# Altium PCB Dog_Tag.PcbDoc
Units mil, origin at the board's own origin, x right, y up, seen from the top; angles counter-clockwise.
Board outline 2793.69 x 1354.84 mil, 2 copper layers (Top Layer, Bottom Layer), stack 21 mil thick; 42 components, 36 nets, 170 pads, 41 vias.
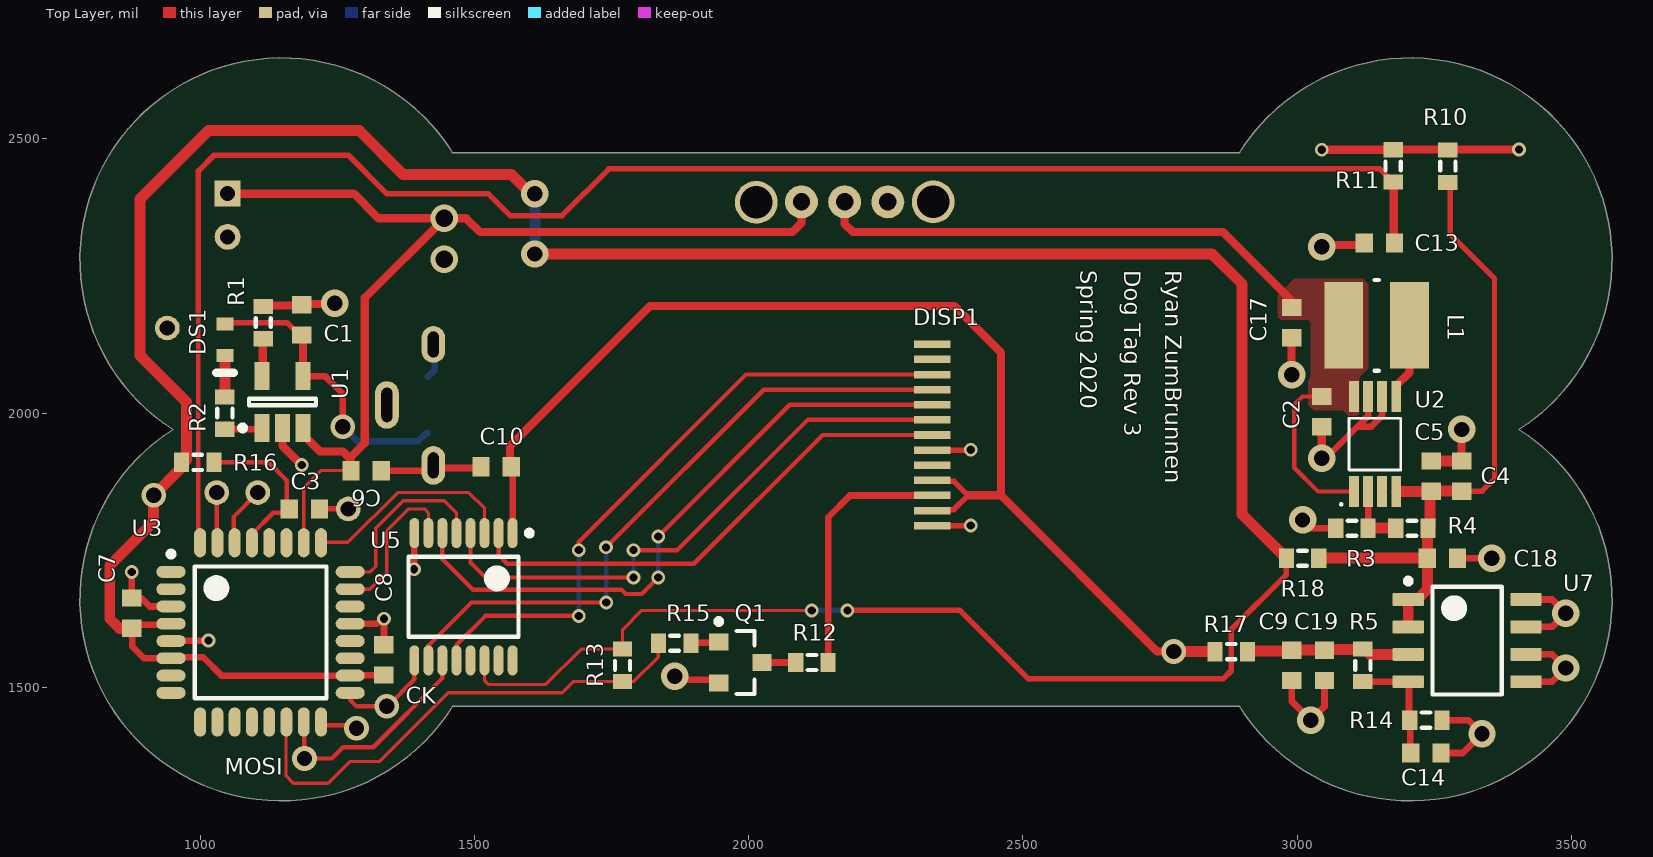
[diagram p0: Top Layer view]
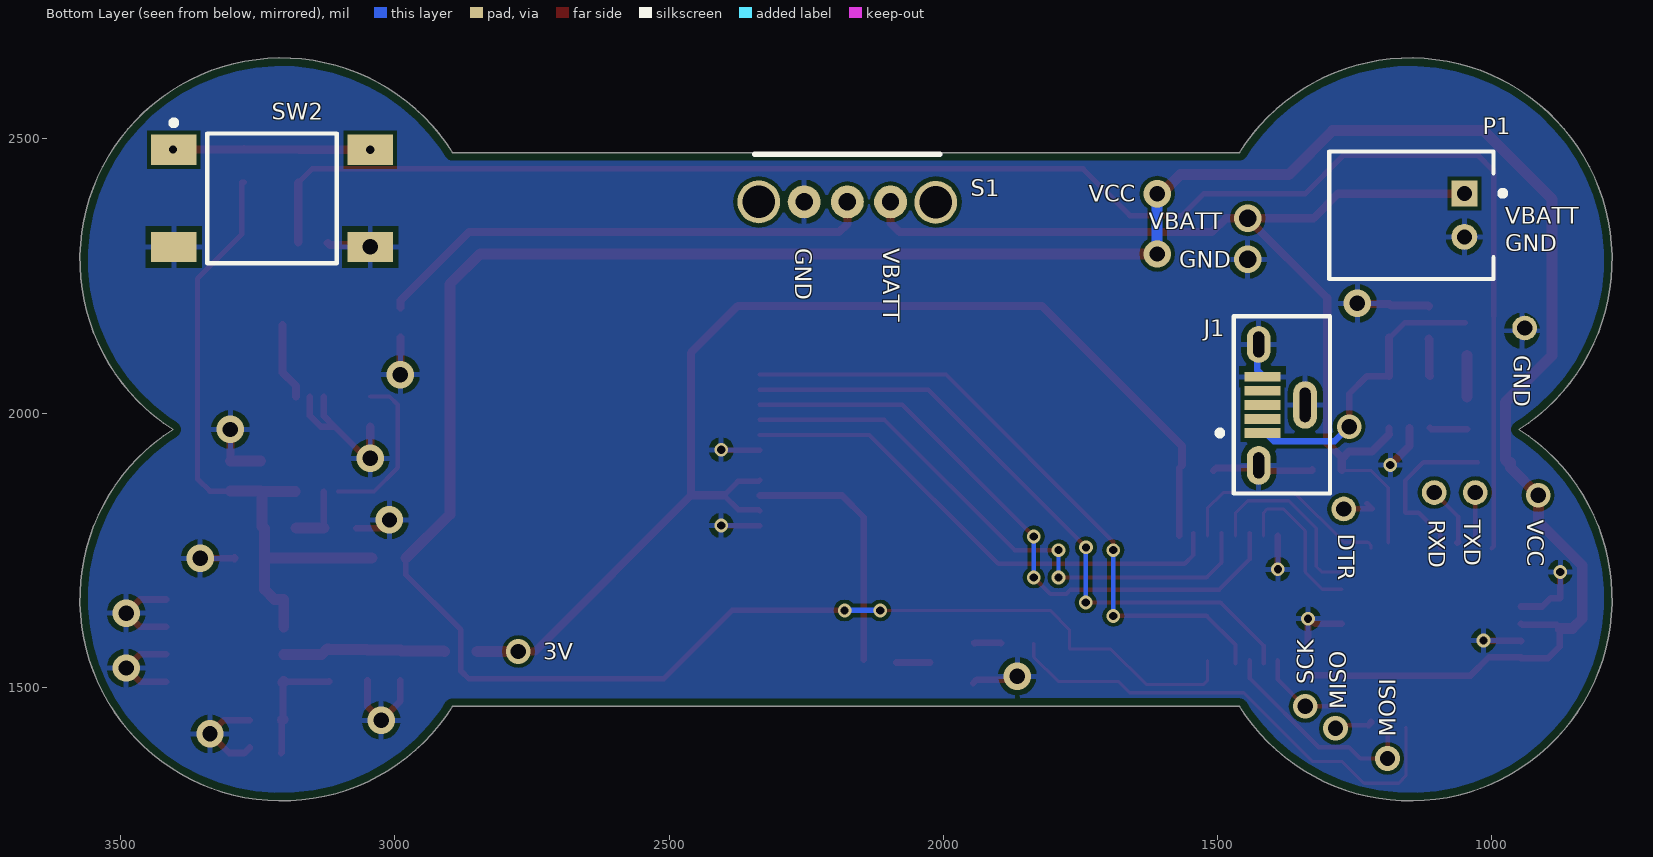
[diagram p1: Bottom Layer view, seen from below]
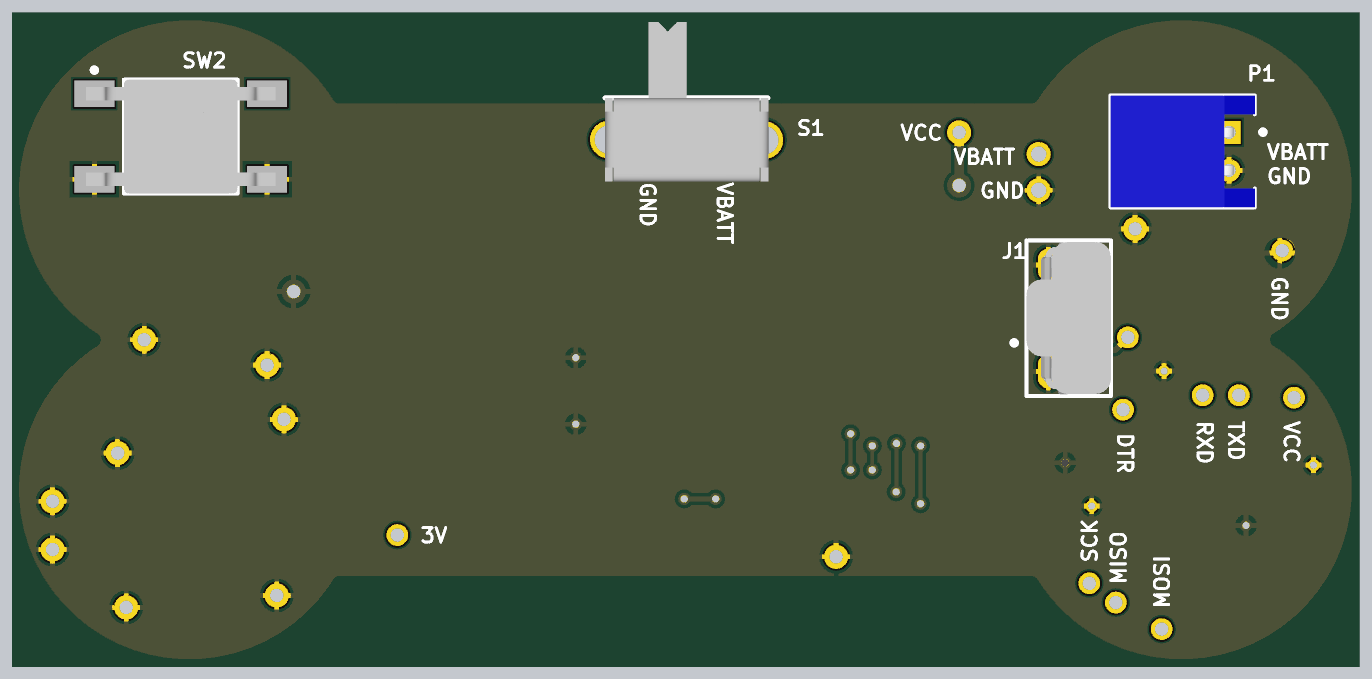
[diagram p2: 3D render of the assembled board from below, using the file's embedded part models]

## Layer stack, top to bottom
Top Solder: solder mask 0.4, Solder Resist, Dk 3.5
Top Layer: signal copper 1.4
Dielectric 2: prepreg 2.8, Composite dielectric, Dk 4.56
Dielectric 1: prepreg 12.6, Composite dielectric, Dk 4.56
Dielectric 3: prepreg 2.8, Composite dielectric, Dk 4.56
Bottom Layer: signal copper 1.4
Bottom Solder: solder mask 0.4, Solder Resist, Dk 3.5

## Board outline
1459.94,1465.04 cw(c1148.31,1660.3) 950,1970 cw(c1148.31,2279.7) 1459.94,2474.96 1460,2475 2895,2475 2895.06,2474.96 cw(c3206.69,2279.7) 3405,1970 cw(c3206.69,1660.3) 2895.06,1465.04 2895,1465

## Design rules (kind name [scope] priority, off if disabled: settings)
BoardOutlineClearance [All] p1: gap=15 ignorepadtopadclearanceinfootprint=FALSE
Clearance [All] p1: gap=7 ignorepadtopadclearanceinfootprint=FALSE
MinimumSolderMaskSliver [All] p1: minsoldermaskwidth=1.5
PolygonConnect PolygonConnect_5 [All vs IsNamedPolygon('VSW_L01_P018')] p1: thpad.connectstyle=Direct thpad.reliefconductorwidth=10 thpad.reliefentries=4 thpad.polygonreliefangle="90 Angle" thpad.airgapwidth=10 smdpad.connectstyle=Direct smdpad.reliefconductorwidth=10 smdpad.reliefentries=4 smdpad.polygonreliefangle="90 Angle" smdpad.airgapwidth=10 via.connectstyle=Relief via.reliefconductorwidth=10 via.reliefentries=4 via.polygonreliefangle="90 Angle" via.airgapwidth=10
PolygonConnect PolygonConnect_4 [All vs IsNamedPolygon('VSW_L01_P018')] p2: connectstyle=Relief reliefconductorwidth=15 reliefentries=4 polygonreliefangle="90 Angle" airgapwidth=10
PolygonConnect PolygonConnect_3 [All vs IsNamedPolygon('VSW_L01_P018')] p3: thpad.connectstyle=Relief thpad.reliefconductorwidth=10 thpad.reliefentries=4 thpad.polygonreliefangle="90 Angle" thpad.airgapwidth=10 smdpad.connectstyle=Relief smdpad.reliefconductorwidth=15 smdpad.reliefentries=4 smdpad.polygonreliefangle="90 Angle" smdpad.airgapwidth=10 via.connectstyle=Relief via.reliefconductorwidth=10 via.reliefentries=4 via.polygonreliefangle="90 Angle" via.airgapwidth=10
PolygonConnect PolygonConnect_2 [All vs IsNamedPolygon('VSW_L01_P018')] p4: thpad.connectstyle=Relief thpad.reliefconductorwidth=10 thpad.reliefentries=4 thpad.polygonreliefangle="90 Angle" thpad.airgapwidth=10 smdpad.connectstyle=Direct smdpad.reliefconductorwidth=10 smdpad.reliefentries=4 smdpad.polygonreliefangle="90 Angle" smdpad.airgapwidth=10 via.connectstyle=Relief via.reliefconductorwidth=10 via.reliefentries=4 via.polygonreliefangle="90 Angle" via.airgapwidth=10
PolygonConnect PolygonConnect_1 [All vs IsNamedPolygon('Top Layer-VBatt') Or  IsNamedPolygon('Top Layer-NetD5_1')] p5: connectstyle=Direct reliefconductorwidth=10 reliefentries=4 polygonreliefangle="90 Angle" airgapwidth=10
PolygonConnect [All] p6: connectstyle=Relief reliefconductorwidth=10 reliefentries=4 polygonreliefangle="90 Angle" airgapwidth=10
RoutingVias [All] p1: holewidth=28 width=50 viastyle="Through Hole" minholewidth=15 minwidth=25 maxholewidth=50 maxwidth=100
SilkToSilkClearance [All] p1: silktosilkclearance=5
SilkToSolderMaskClearance [IsPad] p1: minsilkscreentomaskgap=3.5 clearancetoexposedcopper=TRUE
SolderMaskExpansion [All] p1: expansion=4
Width [All] p1: maxlimit=30 minlimit=6 preferedwidth=10
27 further rules are at their usual default settings.

## Components (designator, comment, footprint, x,y, rotation, side; value= is the part's Value field where it differs from the comment)
C1 "Cap Semi" 1608[0603] 1185,2170 r270 top value=10uF
C2 "Cap Semi" 1608[0603] 3045,2002.44 r90 top value=10uF
C3 "Cap Semi" 1608[0603] 1190,1825 r180 top value=0.1uF
C4 "Cap Semi" 1608[0603] 3300,1885 r270 top value=10uF
C5 "Cap Semi" 1608[0603] 3245,1885 r270 top value=10uF
C6 "Cap Semi" 1608[0603] 1302.56,1895 r180 top value=10uF
C7 "Cap Semi" 1608[0603] 875,1635 r270 top value=10uF
C8 "Cap Semi" 1608[0603] 1335,1550 r270 top value=10uF
C9 "Cap Semi" 1608[0603] 2990,1540 r90 top value=10uF
C10 "Cap Semi" 1608[0603] 1539.61,1902.24 r0 top value=10uF
C13 "Cap Semi" 1608[0603] 3150,2310 r0 top value=0.1uF
C14 "Cap Semi" 1608[0603] 3235,1380 r180 top value=330pF
C17 "Cap Semi" 1608[0603] 2990,2165 r90 top value=10uF/4.7uF
C18 "Cap Semi" 1608[0603] 3265,1735 r180 top value=10uF
C19 "Cap Semi" 1608[0603] 3050,1540 r90 top value=10uF
DISP1 "DISP_LCD_GENERIC_SPI_1.14IN_240X135_WRAPUNDER" TFT1.14 2335,2125.24 r0 top locked (schematic designator DISP?)
DS1 "TLMS1000-GS08" VISH-TLMS1000_V 1045,2133.54 r270 top
J1 "1051330011" MOLX-1051330011-5_V 1382.68,2014.76 r90 bottom
L1 "Inductor" SRN4018TA-4R7M 3145,2160 r180 top value=4.7uH
P1 "S2B-PH-K-S(LF)(SN)" JST-S2B-PH-K-S_V 1146.46,2360.63 r270 bottom
Q1 "MMBT2222ALT1G" ONSC-SOT-23-3-318-08_V 1985,1545 r0 top
R1 "Res3" J1-0603 1115,2165 r90 top value=5K
R2 "Res3" J1-0603 1045,2000 r270 top value=470
R3 "Res3" J1-0603 3100,1790 r180 top value=309K
R4 "Res3" J1-0603 3209.53,1790 r180 top value=953K
R5 "Res3" J1-0603 3120,1540 r90 top value=100K
R10 "Res3" J1-0603 3275,2450 r270 top value=100K
R11 "Res3" J1-0603 3175,2450.47 r90 top value=10K
R12 "Res3" J1-0603 2115.47,1545 r0 top value=22
R13 "Res3" J1-0603 1770,1540 r90 top value=10K
R14 "Res3" J1-0603 3235,1440 r180 top value=143K
R15 "Res3" J1-0603 1865,1580 r180 top value=1K
R16 "Res3" J1-0603 995.47,1910 r180 top value=10K
R17 "Res3" J1-0603 2880,1565 r0 top value=0
R18 "Res3" J1-0603 3010,1735 r0 top value=0
S1 "SW-SPDT" OS102011MA1QN1 2175,2385 r0 bottom
SW2 "FSM6JSMA" TECO-FSM6JSMA_V 3224.13,2391.42 r90 bottom
U1 "MCP73831T-2ATI/OT" SOT-23-OT5_M 1150,2020 r90 top
U2 "MCP1642D" MCP1642D 3103.82,1856.77 r90 top
U3 "ATmega328P-AU" 32A_L 1110,1600 r0 top
U5 "74HC4050PW,118" 74HC4050PW 1480,1665 r270 top
U7 "TL5209DR" D0008A_N 3310,1585 r0 top

## Footprints (in the part's own frame and the unit in brackets; to place one, negate y for a bottom-side part, rotate by r counter-clockwise, add the part's x,y. Pads: shape width x height; smd on the part's side, far side on the other; paste and mask are expansions set on the pad)
32A_L [mm] "Thin QFP, 32-Leads, Body 7x7mm, Pitch 0.8mm, IPC High Density"
  oval 1.35x0.55 smd: 1(-4.15,2.8) 2(-4.15,2) 3(-4.15,1.2) 4(-4.15,0.4) 5(-4.15,-0.4) 6(-4.15,-1.2) 7(-4.15,-2) 8(-4.15,-2.8) 17(4.15,-2.8) 18(4.15,-2) 19(4.15,-1.2) 20(4.15,-0.4) 21(4.15,0.4) 22(4.15,1.2) 23(4.15,2) 24(4.15,2.8)
  oval 0.55x1.35 smd: 9(-2.8,-4.15) 10(-2,-4.15) 11(-1.2,-4.15) 12(-0.4,-4.15) 13(0.4,-4.15) 14(1.2,-4.15) 15(2,-4.15) 16(2.8,-4.15) 25(2.8,4.15) 26(2,4.15) 27(1.2,4.15) 28(0.4,4.15) 29(-0.4,4.15) 30(-1.2,4.15) 31(-2,4.15) 32(-2.8,4.15)
  silkscreen extent -4.27,-3.05 3.05,3.75, body extent -3.5,-3.5 3.5,3.5, height 1.2
74HC4050PW [mm] "Buffer, Non-Inverting 6 Element 1 Bit per Element Push-Pull Output 16-TSSOP"
  oval 1.4x0.45 smd: 1(-2.95,2.275) 2(-2.95,1.625) 3(-2.95,0.975) 4(-2.95,0.325) 5(-2.95,-0.325) 6(-2.95,-0.975) 7(-2.95,-1.625) 8(-2.95,-2.275) 9(2.95,-2.275) 10(2.95,-1.625) 11(2.95,-0.975) 12(2.95,-0.325) 13(2.95,0.325) 14(2.95,0.975) 15(2.95,1.625) 16(2.95,2.275)
  silkscreen extent -3.07,-2.55 1.85,3.17, body extent -3.2,-2.55 3.2,2.55, height 1.1
1608[0603] [mm] "Chip Capacitor, Body 1.6x0.8mm, IPC High Density"
  rect 0.8x0.9 smd: 1(-0.7,0) 2(0.7,0)
  body extent -0.87,-0.48 0.87,0.48, height 1.3
D0008A_N [mm] "SOIC, 8-Leads, Body 5x4mm, Pitch 1.27mm, IPC Medium Density"
  rrect17% 1.45x0.6 smd: 1(-2.725,1.905) 2(-2.725,0.635) 3(-2.725,-0.635) 4(-2.725,-1.905) 5(2.725,-1.905) 6(2.725,-0.635) 7(2.725,0.635) 8(2.725,1.905)
  silkscreen extent -2.85,-2.5 1.6,2.88, body extent -3,-2.45 3,2.45, height 1.63
J1-0603 [mm] "Chip Resistor, Body 1.6x0.8mm, IPC High Density"
  rect 0.7x0.9 smd: 1(-0.75,0) 2(0.75,0)
  silkscreen extent -0.2,-0.35 0.2,0.35, body extent -0.85,-0.48 0.85,0.48, height 0.9
JST-S2B-PH-K-S_V [mm] "THD, 2-Leads, Body 7.6x5.9mm, Pitch 2mm"
  rect 1.2x1.2 hole 0.7: 1(-1,2.45)
  round 1.2 hole 0.7: 2(1,2.45)
  silkscreen extent -2.95,-3.8 2.95,4.35, body extent -2.95,-3.8 2.95,3.8, height 4.8
MCP1642D [mm] "Boost Switching Regulator IC Positive Adjustable 1.8V 1 Output 800mA 8-TSSOP, 8-MSOP (0.118\", 3.00mm Width)"
  rect 1.45x0.45 smd: 1(0,0) 2(0,-0.65) 3(0,-1.3) 4(0,-1.95) 5(4.4,-1.95) 6(4.4,-1.3) 7(4.4,-0.65) 8(4.4,0)
  silkscreen extent -0.64,-2.16 3.39,0.64
MOLX-1051330011-5_V [mm] "Micro-B USB, 5-Leads, Body 8x4.45mm, Pitch 0.65mm"
  rect 0.45x1.651 smd: 1(-1.3,0.901) 2(-0.65,0.901) 3(0,0.901) 4(0.65,0.901) 5(1.3,0.901)
  oval 1.8x1.1 hole 0.5 slot 1.2 at 0 deg: 6(-2.8,1.075)
  oval 1.7x1.1 hole 0.5 slot 1.2 at 0 deg: 7(2.8,1.075)
  oval 2.2x1.1 hole 0.5 slot 1.6 at 0 deg: 8(0,-1.075)
  silkscreen extent -4.1,-2.22 4.1,3, body extent -4.01,-2.22 4.01,2.23, height 7.5
ONSC-SOT-23-3-318-08_V [mm] "SOT23, 3-Leads, Body 2.92x1.3mm, Pitch 0.95mm"
  rect 0.9x0.8 smd: 1(-1,0.95) 2(-1,-0.95) 3(1,0)
  silkscreen extent -1.12,-1.46 0.65,2.02, body extent -0.65,-1.46 0.65,1.46, height 1.11
OS102011MA1QN1 [mil] "Slide Switch SPDT Through Hole, Right Angle"
  round 60 hole 31.5: 1(-78.74,0) 2(0,0) 3(78.74,0)
  silkscreen extent -169,-87 169,-87, body extent -169,-244 169,87, height 187
SOT-23-OT5_M [mm] "SOT23, 5-Leads, Body 2.9x1.7mm, Pitch 0.95mm, Lead Span 2.8mm, IPC Low Density"
  rect 1.3x0.7 smd: 1(-1.2,0.95) 2(-1.2,0) 3(-1.2,-0.95) 4(1.2,-0.95) 5(1.2,0.95)
  silkscreen extent -1.32,-1.55 0.15,1.97, body extent -0.9,-1.55 0.9,1.55, height 1.45
SRN4018TA-4R7M [mm] "4.7µH Semi-Shielded Wirewound Inductor 1.7A 70mOhm Nonstandard"
  rect 1.8x4 smd: 1(-1.524,0) 2(1.524,0)
  silkscreen extent -0.1,-2.1 0.1,2.1, body extent -2.1,-2.1 2.1,2.1, height 1.8
TECO-FSM6JSMA_V [mm] "SMD, 4-Leads, Body 6x6mm, Pitch 4.5mm"
  rect 1.4x2.1 smd: 1(2.25,4.55) 2(2.25,-4.55) 3(-2.25,4.55) 4(-2.25,-4.55)
  silkscreen extent -3,-3 3.62,4.68, body extent -3,-5 3,5, height 7.11
TFT1.14 [mm] "LCD Pinout"
  rect 1.7x0.35 smd: 1(0,0) 2(0,-0.7) 3(0,-1.4) 4(0,-2.1) 5(0,-2.8) 6(0,-3.5) 7(0,-4.2) 8(0,-4.9) 9(0,-5.6) 10(0,-6.3) 11(0,-7) 12(0,-7.7) 13(0,-8.4)
VISH-TLMS1000_V [mm] "SMD, 2-Leads, Body 0.8x1.6mm"
  rect 0.6x0.8 smd: 1(-0.725,0) 2(0.725,0)
  silkscreen extent 1.52,-0.4 1.52,0.4, body extent -0.8,-0.4 0.8,0.4, height 0.65

## Part data
C1 C2 C3 C4 C5 C6 C7 C8 C9 C10 C13 C14 C17 C18 C19: "Capacitor (Semiconductor SIM Model)", LatestRevisionDate=29-May-2009, LatestRevisionNote="IPC-7351 Footprint Added.", PackageDescription="Chip Capacitor", PackageReference=C1206, Published=8-Jun-2000, Publisher="Altium Limited"
DS1: library part CMP-2000-07254-1, "Low Current LED, 40 mW, 1.8 V, -40 to 100 degC, 2-Pin SMD (0603), RoHS, Tape and Reel", Forward Current If=2mA, Forward Voltage=1.8V, LED Colour=Red, Manufacturer=Vishay, Package Description="2-Pin Surface Mount Device, Body 1.6 x 0.8 mm", Package Reference=TLMS1000, Automotive Qualification Standard=AEC-Q100, Bulb Size=1.6mmx0.8mm, Datasheet URL=https://datasheet.ciiva.com/5798/1698881-5798337.pdf, Datasheet Version="Rev. 1.7, 02/2011", LED Mounting=SMD, Lens Shape=Rectangular, Luminous Intensity=4mcd, Manufacturer URL=http://www.vishay.com/, Mounting Technology=SurfaceMount, MSL=MSL2-1year, Packaging=CutTape, Product Range=-, SVHC=ToBeAdvised, Viewing Angle=80°, Wavelength Typ=636nm
J1: library part CMP-2000-05241-1, "Micro-B USB Vertical Type, -30 to 85 degC, 5-Pin SMD, RoHS, Tape and Reel", Manufacturer=Molex, Standard Package=500, 3D Model=105133-0011.stp, Category=Connectors,Interconnects, Connector Type=USB-microB, Datasheet URL=http://www.molex.com/pdm_docs/sd/1051330011_sd.pdf, Datasheet Version="Rev. G, 01/2011", Family=USB,DVI,HDMIConnectors, Featured Product=USBConnectors, Features=BoardGuide, Gender=Receptacle, Ingress Protection=-, Manufacturer URL=http://www.molex.com/, Mounting Type=SurfaceMountVertical, Number of Contacts=5, Online Catalog=Molex-MicroUSB, Other Names=105133-0011887191097947WM10134TR, Packaging=Tape&Reel(TR), PCN Other=105133Series21/Jul/2015, PCN Packaging=105133Series03/Oct/2015, RoHS Information=105133-0011Cert.ofCompliance, Series=105133, Specifications=-
P1: library part CMP-1755-00004-1, "Male Header, Pitch 2 mm, 1 x 2 Position, Height 4.8 mm, Tail Length 3.4 mm, -25 to 85 degC, RoHS, Bulk", Capacitance="10 uF", Case\Package=Radial, Max Operating Temperature="85 degC", Min Operating Temperature="-40 degC", Package Quantity=200, Tolerance=20%, Voltage Rating="50 V", ComponentLink1Description=Datasheet, ComponentLink1URL=http://www.jst-mfg.com/product/pdf/eng/ePH.pdf, DatasheetVersion=Dec-12, Diameter="5 mm", Height="11 mm", Lead Pitch="2 mm", Length="11 mm", Mount="Through Hole", PackageDescription="Male Header, Pitch 2 mm, 1 x 2 Position, Height 4.8 mm, Tail Length 3.4 mm", PackageReference=S2B-PH-K-S, Packaging=Bulk, Pins=2, Radiation Hardening=No, REACH SVHC="No SVHC", RoHSCompliant=true, Voltage Rating (DC)="50 V"
Q1: library part CMP-1048-00538-1, "General Purpose Transistor, NPN Silicon, 3-Pin SOT-23, Pb-Free, Tape and Reel", Manufacturer="On Semiconductor", ComponentLink1Description="Manufacturer URL", ComponentLink1URL=http://www.onsemi.com/, ComponentLink2Description=Datasheet, ComponentLink2URL=http://www.onsemi.cn/pub_link/Collateral/MMBT2222LT1-D.PDF, ComponentLink3Description="Package Specification", ComponentLink3URL=http://www.onsemi.cn/pub_link/Collateral/318-08.PDF, DatasheetVersion="Rev. 10", fT Min (MHz)=300, IC Continuous (A)=0.6, Mounting Technology="Surface Mount", PackageDescription="3-Pin Small Outline Transistor, Body 2.92 x 1.3 mm, Pitch 0.95 mm", PackageReference=SOT-23-3-318-08, PackageVersion="Rev. AP, 11/2009", Packing="Tape and Reel", PartNumber=MMBT2222ALT1G, Polarity=NPN, RoHS=TRUE
R1 R2 R3 R4 R5 R10 R11 R12 R13 R14 R15 R16 R17 R18: "Resistor", LatestRevisionDate=29-May-2009, LatestRevisionNote="IPC-7351 Footprint Added.", PackageDescription="Chip Resistor", PackageReference=J1-0603, Published=8-Jun-2000, Publisher="Altium Limited"
S1: "SPDT Subminiature Toggle Switch, Right Angle Mounting, Vertical Actuation", ComponentLink1Description="Manufacturer Link", ComponentLink1URL=http://www.apem.com, DatasheetVersion=05-Dec-2000, LatestRevisionDate=17-Dec-2003, LatestRevisionNote="Schematic revised, PCB Footprint replaced.", PackageDescription="Switch; 4 Leads", PackageReference=TL36WW15050, Published=24-Mar-1999, Publisher="Altium Limited"
SW2: library part CMP-2000-07503-1, "Switch, SPST, 24 V, -35 to 85 degC, 4-Pin SMD, RoHS, Tape and Reel", Case\/Package=SMD/SMT, Contact Current Rating=50mA, Contact Resistance=100mOhm, Insulation Resistance=100MOhm, Manufacturer="TE Connectivity", Max Operating Temperature=85degC, Max Voltage Rating (DC)=12V, Min Operating Temperature=-35degC, Operating Force=1.57N, Package Description="4-Pin Surface Mount Device, Body 6 x 6 mm, Pitch 4.5 mm", Package Quantity=750, Voltage Rating=24V, Actuator Length=3.4mm, Actuator Material=Polyamide, Contact Material=CopperAlloy, Contact Plating=Silver, Current Rating=50mA, Datasheet URL=http://www.te.com/commerce/DocumentDelivery/DDEController?Action=showdoc&DocId=Customer+Drawing%7F2-1437565-7%7FV%7Fpdf%7FEnglish%7FENG_CD_2-1437565-7_V.pdf%7F4-1437565-9, Datasheet Version="Rev. V, 02/2015", Electrical Life=100000Cycles, ELV=Compliant, Illumination Type=Illuminated, Lead Free=LeadFree, Length=6mm, Manufacturer URL=http://www.te.com/, Mechanical Life=100000Cycles, Mount=SurfaceMount, Mounting Technology=SurfaceMount, Orientation=Straight, Package Reference=FSM6JSMA, Packaging=LoosePiece, REACH SVHC=Unknown, RoHSCompliant=true, Switch Travel=0.25mm, Termination=GullWing, Throw Configuration=SPST, Voltage Rating (DC)=24V, Width=6mm
U1: library part CMP-0133-00144-1, "Miniature Single-Cell, Fully Integrated Li-Ion, Li-Polymer Charge Management Controller, 4.2V, 5-Pin SOT-23, Industrial Temperature, Tape and Reel", Code_IPC=SOT23-5, DatasheetVersion="revE, Sep-2008", PackageDescription="5-Lead Plastic Small Outline Transistor (OT) [SOT-23]", PackageReference=SOT-23-OT5, PackageVersion="revBB, Aug-2009"
U2: library part MCP1642D-ADJI/MS, "Boost Switching Regulator IC Positive Adjustable 1.8V 1 Output 800mA 8-TSSOP, 8-MSOP (0.118\", 3.00mm Width)", ComponentLink1Description=Digikey, ComponentLink1URL=https://www.digikey.com/product-detail/en/microchip-technology/MCP1642D-ADJI-MS/MCP1642D-ADJI-MS-ND/5137721
U3: library part CMP-0095-00269-2, "8-bit AVR Microcontroller, 32KB Flash, 1KB EEPROM, 2KB SRAM, 32-pin TQFP, Industrial Grade (-40°C to 85°C)", Code_JEDEC=MS-026-ABA, ComponentLink1Description="Manufacturer URL", ComponentLink1URL=http://www.atmel.com/, ComponentLink2Description="ATmega48A/48PA/88A/88PA/168A/168PA/328/328P Datasheet", ComponentLink2URL=http://www.atmel.com/dyn/resources/prod_documents/doc8271.pdf, ComponentLink3Description="ATmega48A/48PA/88A/88PA/168A/168PA/328/328P Summary", ComponentLink3URL=http://www.atmel.com/dyn/resources/prod_documents/8271S.pdf, DatasheetVersion="revD, May-2011", PackageDescription="32-Lead, 7x7x1.0 mm Body, 0.8mm Lead Pitch, Thin Profile Plastic Quad Flat Package (TQFP)", PackageReference=32A, PackageVersion="revC, Oct-2010", RevisionNote="DatasheetVersion & PackageVersion updated. URLs added."
U5: "Buffer/LevelShifter, Non-Inverting 6 Element 1 Bit per Element Push-Pull Output 16-TSSOP", ComponentLink1Description=Digikey, ComponentLink1URL=https://www.digikey.com/product-detail/en/nexperia-usa-inc/74HC4050PW118/1727-5956-1-ND/2753784
U7: library part CMP-0395-00183-2, "Single Output Low Noise LDO, 500 mA, Adjustable 1.3 to 6.5 V Output, 2.5 to 16 V Input, 8-pin SOIC (D), -40 to 125 degC, Green (RoHS & no Sb/Br)", Manufacturer="Texas Instruments", Rating=Catalog, Accuracy(%)=2, Code_JEDEC=MS-012, ComponentLink1Description="Manufacturer URL", ComponentLink1URL=http://www.ti.com/, ComponentLink2Description=Datasheet, ComponentLink2URL=http://www.ti.com/general/docs/lit/getliterature.tsp?genericPartNumber=TL5209&fileType=pdf, ComponentLink3Description="Package Specification", ComponentLink3URL=http://www.ti.com/litv/pdf/msoi002j, ComponentLink4Description="URL Link1", ComponentLink4URL="Samples URL:http://www.ti.com/product/tl5209#samples", DatasheetVersion=SLVS581A, Eco-Plan="Green (RoHS & no Sb/Br)", Iout(Max)(A)=0.5, Iq(Typ)(mA)=8, Mounting Technology="Surface Mount", PackageDescription="8-Pin Plastic Small Outline, Body 4.9 x 3.9 mm, Pitch 1.27 mm", PackageReference=D0008A, PackageVersion=4040047-3/M, PartNumber=TL5209DR, SubFamily="Single Channel LDO", Vdo(Typ)(mV)=500, Vin(Max)(V)=16, Vin(Min)(V)=2.5, Vout Adj(Max)(V)=6.5, Vout Adj(Min)(V)=2.5
DISP1: DeviceName=_1.14IN_240X135_WRAPUNDER, DeviceSetName=DISP_LCD_GENERIC_SPI, GateName_1=G$1, Generic=Generic, LibraryName=microbuilder, SPITFT="SPI TFT", SymbolName_1=TFT_GENERIC_SPI_VDD
L1: Code_IEC=1005, Code_JEITA=0402, ComponentLink1Description=Digikey, ComponentLink1URL=https://www.digikey.com/product-detail/en/taiyo-yuden/NRS5020T100MMGJ/587-2409-1-ND/2230275, ComponentLink2Description="4.7uH Digikey", ComponentLink2URL=https://www.digikey.com/product-detail/en/bourns-inc/SRN4018TA-4R7M/SRN4018TA-4R7MCT-ND/6565084, LatestRevisionDate=29-May-2009, LatestRevisionNote="IPC-7351 Footprint Added.", PackageDescription="Chip Inductor", PackageReference=0402-A, Published=8-Jun-2000, Publisher="Altium Limited"

## Free pads (board coordinates)
  round 78 hole 59: 3(2014,2384) 3(2336.42,2385)
  round 45 hole 28: 4(940,2155) 4(1030,1855) 4(1105,1855) 4(1270,1825)

## Via types
v1: diameter 25, hole 15, Top Layer to Bottom Layer, tented both sides, 14 vias
v2: diameter 50, hole 28, Top Layer to Bottom Layer, 12 vias
v3: diameter 45, hole 28, Top Layer to Bottom Layer, 6 vias
v4: diameter 25, hole 15, Top Layer to Bottom Layer, 5 vias
v5: diameter 50, hole 32, Top Layer to Bottom Layer, 2 vias
v6: diameter 50, hole 28, Top Layer to Bottom Layer, tented both sides, 2 vias

## Nets (pads, with @x,y where several pads share a name; then routed paths per layer and width w, separated by ;. In a path a pad name is that pad's centre, name@x,y a point inside that pad or via, vN(x,y) a via of type N, cw(c..) or ccw(c..) an arc to the next point about the centre after c; other vN are vias at no path point)
3V: C10.2 DISP1.10 DISP1.12 R17.1 U5.1 | length 2183.1
  Top Layer w10: DISP1.12 2336.89,1823.98 2373.98,1823.98 2400,1850 2374.69,1875.31 2336.89,1875.31 DISP1.10
  Top Layer w12: C10.2@1564.76,1904.65 C10.2 1569.57,1899.84 U5.1 U5.1@1569.57,1776.14
  Top Layer w15: C10.2@1564.76,1904.65 1564.76,1939.76 1820,2195 2375,2195 2460,2110 2460,1850 ; 2400,1850 2460,1850 ; v3(2775,1565) 2745,1565 2460,1850
  Top Layer w20: v3(2775,1565) R17.1
5V: C4.2 C5.2 C18.2 R4.1 R10.2 R18.2 U2.4 U7.1 U7.2 | length 1236
  Top Layer w10: R10.2 3278.94,2420.47 3278.94,2326.06 3360,2245 3360,1880 3337.44,1857.44 C4.2
  Top Layer w20: R18.2@3041.56,1735.47 3041.79,1735.24 C18.2@3237.44,1735.24 ; U2.4@3181.73,1857.11 C5.2@3244.67,1857.11 ; U7.2 U7.1 3219.45,1660 3237.44,1677.99 C18.2 3238.25,1735.81 3238.25,1789.19 R4.1 3242.03,1792.97 3242.03,1854.47 C5.2@3244.67,1857.11 ; C4.2 C5.2 C5.2@3244.67,1857.11
BACKLIGHT: R13.1 R15.2 U3.14 | length 892.6
  Top Layer w6: U3.14@1157.24,1426.61 1156.5,1425.87 1156.5,1338.5 1170,1325 1233.07,1325 1272.57,1364.5 1326.74,1364.5 1452.24,1490 1660,1490 1680.24,1510.24 1769.76,1510.24 R13.1 1790.47,1510.47 1835,1555 1835,1579.53 R15.2@1834.76,1579.76
BUTTON: C13.2 R11.1 U3.32 | length 3082.5
  Top Layer w8: 996.5,2176.5 996.5,1756.65 U3.32@999.76,1753.39
  Top Layer w10: 996.5,2176.5 996.5,2441.5 1025,2470 1270,2470 1340,2400 1525,2400 1565,2360 1660,2360 1745,2445 3150.94,2445 R11.1
  Top Layer w12: R11.1 R11.1@3176.28,2419.67 ; C13.2@3176.28,2311.28 C13.2
  Top Layer w15: C13.2@3176.28,2311.28 R11.1@3176.28,2419.67
DC: U3.23 U5.7 | length 291.9
  Top Layer w6: U3.23 1308.74,1678.74 1340,1710 1340,1785 1380,1825 1409.05,1825 1416.02,1818.03 U5.7 U5.7@1416.02,1776.14
DC_3V: DISP1.5 U5.6 | length 1154.2
  Top Layer w8: U5.6 1441.61,1733.39 1497,1678 1768.08,1678 1776.08,1670 1805,1670 v1(1835,1700) ; v1(1835,1775) 2075,2015 DISP1.5
  Bottom Layer w8: v1(1835,1700) v1(1835,1775)
GND: C1.1 C2.1 C4.1 C5.1 C6.1 C7.1 C8.1 C9.1 C10.1 C13.1 C14.1 C17.1 C18.1 C19.1 DISP1.8 DISP1.13 J1.5 J1.6 J1.7 J1.8 P1.2 pad.4@940,2155 Q1.2 R1.2 R3.2 R14.1 S1.3 SW2.3 SW2.4 U1.2 U2.6 U2.7 U3.3 U3.5 U3.21 U5.8 U7.5 U7.6 U7.7 U7.8 | length 2419.2
  Top Layer w10: DISP1.13 v1@2404.53,1794.53 ; DISP1.8 v1@2404.53,1932.32
  Top Layer w12: v4(875,1710) C7.1 892.44,1662.56 907.76,1647.24 U3.3 ; U3.5 946.99,1584.63 1014.63,1584.63 v1(1015,1585) ; U3.21 1322.23,1615.75 1331.48,1625 v4(1335,1625) C8.1 C8.1@1335,1567.56 ; C6.1@1327.56,1894.76 1415.24,1894.76 J1.6 1429.76,1899.76 1502.68,1899.76 C10.1@1507.44,1895 ; C6.1@1327.56,1895 C6.1@1327.56,1896.97 ; v1(1390,1715) 1390.22,1715.22 1390.22,1775.93 U5.8@1390.43,1776.14 ; v2(1865,1520) 1871.2,1513.8 1939.43,1513.8 Q1.2 ; C9.1 2990,1474.72 v2(3025,1439.72) 3050,1464.72 C19.1 ; v2(3010,1805) 3025,1790 R3.2 ; v2(3045,1917.44) 3052.44,1917.44 3109.88,1974.88 ; U2.7 3129.41,1994.41 3109.88,1974.88 ; U2.6 3155,1995 3134.88,1974.88 3109.88,1974.88 ; C14.1@3264.53,1390 3274.53,1380 3302.24,1380 v2(3337.24,1415) 3312.24,1440 R14.1 ; C18.1 v2(3355,1735) ; U7.5 3465,1510 v2(3490,1535) 3465,1560 U7.6 ; U7.7 3465,1610 v2(3490,1635) 3465,1660 U7.8
  Top Layer w15: R1.2 1116.52,2196.04 1183.48,2196.04 C1.1 1186.22,2198.78 v2@1243.78,2198.78 ; U1.2 1150,1940 v4(1185,1905) ; v6(2990,2070) C17.1 ; v2(3045,1917.44) C2.1 ; v2@3048.58,2306.42 3118.86,2306.42 C13.1 ; C4.1 v2(3300,1970)
  Top Layer w20: C5.1 C4.1
  Bottom Layer w12: J1.5@1415.16,2065.94 1427.32,2078.11 J1.7@1427.32,2115.24
  other v1: 2405,1795 2405,1932.8
  other v2: 1245,2200 3045,2302.83
  other v5: 1445,2280
LED_K: DISP1.11 R12.2 | length 466.4
  Top Layer w12: R12.2@2145,1550 2145,1810 2184.65,1849.65 DISP1.11
MISO: U3.16 | length 70.4
  Top Layer w8: U3.16@1224.7,1430.81 v3@1279.19,1430.81
  Top Layer w12: U3.16 1220.24,1435.27 U3.16@1224.7,1430.81 ; v3@1279.19,1430.81 v3(1285,1425)
MOSI: U3.15 U5.11 | length 411.7
  Top Layer w8: U3.15 1190,1435.35 v3(1190,1370) 1240,1370 1260.5,1390.5 1315.5,1390.5 1441.61,1516.61 U5.11
MOSI_3V: DISP1.3 U5.12 | length 1184.4
  Top Layer w8: U5.12@1467.2,1543.86 1467.2,1577.2 1520,1630 v1(1690,1630) ; v1(1690,1750) 1690,1765 1995.12,2070.12 DISP1.3
  Bottom Layer w8: v1(1690,1630) v1(1690,1750)
NetC3_2: C3.2 R16.1 U3.29 | length 310.5
  Top Layer w8: R16.1 1125,1910 1157.44,1877.56 1157.44,1825 1157.44,1818.03 1133.03,1818.03 1094.25,1779.25 U3.29 U3.29@1094.25,1753.39
NetC9_2: C9.2 C19.2 R5.2 R17.2 U7.3 | length 299
  Top Layer w20: R17.2 2910.81,1566.28 2988.72,1566.28 C9.2 C19.2 3050.98,1568.54 3119.02,1568.54 R5.2 3123.94,1569.53 3133.46,1560 U7.3
NetC14_2: C14.2 R5.1 R14.2 U7.4 | length 214.9
  Top Layer w12: R5.1 3120.24,1510.24 3202.48,1510.24 U7.4 ; R14.2@3204.09,1441.38 U7.4@3204.09,1508.62 ; R14.2 3206.46,1439.02 3206.46,1380.98 C14.2
  Top Layer w20: U7.4 U7.4@3204.09,1508.62 ; R14.2@3204.09,1441.38 R14.2
NetDS1_2: DS1.2 R2.1 | length 75.5
  Top Layer w20: R2.1 DS1.2
NetL1_1: L1.1 U2.5 | length 140.1
  Top Layer w15: U2.5 3180.59,2049.68 3205,2074.09 L1.1
NetQ1_1: Q1.1 R15.1 | length 53.1
  Top Layer w8: Q1.1@1943.23,1580 Q1.1
  Top Layer w12: R15.1 1895.73,1581.2 1942.03,1581.2 Q1.1@1943.23,1580
NetQ1_3: Q1.3 R12.1 | length 61.6
  Top Layer w12: Q1.3 R12.1
NetR1_1: R1.1 U1.5 | length 69.2
  Top Layer w15: U1.5 1113.8,2068.44 1113.8,2134.27 R1.1
NetR2_2: R2.2 U1.1 | length 68.5
  Top Layer w12: R2.2 1110.31,1970.47 U1.1
NetR3_1: R3.1 R4.2 U2.2 | length 117.3
  Top Layer w12: U2.2 3129.47,1856.71 3129.47,1790.06 R3.1
  Top Layer w20: R3.1 R4.2
NetR10_1: R10.1 R11.2 SW2.1 SW2.2 | length 360.1
  Top Layer w15: v4(3045,2480) R11.2 3175.47,2480.47 3274.53,2480.47 3275,2480.94 3275.47,2480.47 v4(3404.53,2480.47)
Quiet_3V: U5.15
RESET: C3.1 pad.4@1270,1825 | length 66.6
  Top Layer w10: C3.1@1227.56,1835 C3.1 pad.4@1270,1825
RXD: pad.4@1105,1855 U3.30 | length 110.3
  Top Layer w8: U3.30@1061.38,1764.76 1061.38,1811.38 pad.4@1105,1855
  Top Layer w12: U3.30@1061.38,1764.76 U3.30
SCK: U3.17 U5.9 | length 190.1
  Top Layer w8: U3.17 1273.39,1476.61 1285,1465 v3(1340,1465) 1341.28,1465 1390.43,1514.16 U5.9
SCK_3V: DISP1.4 U5.10 | length 1204
  Top Layer w8: U5.10@1416.02,1543.86 1416.02,1576.02 1494.5,1654.5 v1(1740.5,1654.5) ; v1(1740,1755) 2027.56,2042.56 DISP1.4
  Bottom Layer w8: v1@1740,1655 v1(1740,1755)
  Bottom Layer w10: v1@1740,1655 v1(1740.5,1654.5)
T\F\T\R\S\T\: U3.24 U5.5 | length 339.5
  Top Layer w6: U3.24 1310.1,1710.24 1320,1720.13 1320,1790 1370,1840 1445.23,1840 1467.2,1818.03 U5.5 U5.5@1467.2,1776.14
T\F\T\R\S\T\_\3\V\: DISP1.6 U5.4 | length 1055.8
  Top Layer w8: U5.4 1492.8,1727.2 1520,1700 v1(1790,1700) ; v1(1790,1750) 1870,1750 2107.44,1987.44 DISP1.6
  Bottom Layer w8: v1(1790,1700) v1(1790,1750)
TFTCS: U3.25 U5.3 | length 405.6
  Top Layer w6: U3.25@1220.24,1753.39 1220.24,1758.75 1225.62,1764.13 1269.13,1764.13 1360,1855 1490,1855 1518.39,1826.61 U5.3 U5.3@1518.39,1776.14
TFTCS_3V: DISP1.7 U5.2 | length 935.1
  Top Layer w8: U5.2 1543.98,1741.02 1560,1725 1900,1725 2134.88,1959.88 DISP1.7
TXD: pad.4@1030,1855 U3.31 | length 96.3
  Top Layer w8: pad.4@1030,1855 1030,1774.65 1025,1769.65 U3.31
VBatt: C6.2 P1.1 S1.1 U1.3 U3.26 | length 1965.4
  Top Layer w6: U3.26 1188.74,1863.74 1220,1895 C6.2
  Top Layer w12: U1.3@1187.4,1960.94 U1.3
  Top Layer w15: P1.1 1280,2400 1325,2355 v5(1445,2355) ; U1.3@1187.4,1960.94 1218.41,1929.94 1260.06,1929.94 1272.56,1917.44 ; C6.2@1273.51,1895.95 1273.51,1918.51 1300,1945 1300,2210 v5(1445,2355) ; S1.1 2096.26,2346.26 2080,2330 1510,2330 1485,2355 v5(1445,2355)
VCC: C7.2 C8.2 R13.2 R16.2 R18.1 U3.4 U3.6 U3.18 U5.14 | length 6055.7
  Top Layer w6: U5.14 1518.39,1511.61 1525,1505 1630,1505 1694.53,1569.53 R13.2 1770,1605 1805,1640 v1(2115,1640)
  Top Layer w10: v1(2180,1640) 2385,1640 2510,1515 2865,1515 2880,1530 2880,1605 2980.47,1705.47 R18.1
  Top Layer w12: U3.6 897.24,1552.76 876.31,1573.69 876.31,1603.87 876.31,1606.13 C7.2 881.46,1613.9 944.77,1613.9 U3.4 ; U3.6@946.61,1554.6 1005.4,1554.6 1038.74,1521.26 U3.18 ; U3.18@1273.98,1521.85 C8.2@1335,1521.85
  Top Layer w15: C7.2@875,1602.56 876.31,1603.87 C7.2@876.92,1604.48
  Top Layer w20: C7.2 852.46,1607.44 835,1624.9 835,1721.72 915,1801.72 v3@915,1845 ; v3(915.47,1850) 965.94,1900.47 R16.2@965.94,1905.47 ; R16.2@965.47,1905 R16.2@965.94,1905.47 ; R16.2 R16.2@965.94,1905.47 ; v6(1610,2290) 2845,2290 2900,2235 2900,1815 R18.1@2979.53,1735.47 ; v2(1610,2400) 1602.22,2400 1567.22,2435 1370,2435 1290,2515 1015,2515 890,2390 890,2105 975,2020 975,1914.53 R16.2@965.94,1905.47
  Bottom Layer w10: v1(2115,1640) v1(2180,1640)
  Bottom Layer w20: v6(1610,2290) v2(1610,2400)
VIN: C1.2 DS1.1 J1.1 U1.4 | length 539.4
  Top Layer w10: DS1.1@1047.91,2165 1158.03,2165 1183.03,2140 1185,2140 C1.2@1187.4,2137.6
  Top Layer w12: U1.4 1227.76,2067.24 1260,2035 v3(1260,1975)
  Top Layer w15: U1.4 C1.2@1187.4,2137.6
  Bottom Layer w12: v3(1260,1975) 1286.31,1948.69 1397.35,1948.69 1412.24,1963.58 J1.1@1415.16,1963.58
VSW: C2.2 C17.2 L1.2 S1.2 U2.1 U2.8 | length 1223.4
  Top Layer w8: C2.2 3010,2030 2995,2015 2995,1900 3038.23,1856.77 U2.1
  Top Layer w15: S1.2 2175,2345 2190,2330 2865,2330 2990,2205 C17.2
pads on no net: DISP1.1 DISP1.2 DISP1.9 J1.2 J1.3 J1.4 U2.3 U3.1 U3.2 U3.7 U3.8 U3.9 U3.10 U3.11 U3.12 U3.13 U3.19 U3.20 U3.22 U3.27 U3.28 U5.13 U5.16

## Polygon pours and split planes (outlines as drawn)
VSW on Top Layer "VSW_L01_P018" (solid, pour order 18): 2965,2215 2995,2245 3120,2245 3130,2235 3130,2082 3113,2065 3113,1998 3110,1995 3093,1995 3083,2005 3030,2005 3020,2015 3020,2060 3025,2065 3025,2165 3020,2170 2970,2170 2965,2175
GND on Bottom Layer "Bottom Layer-GND" (solid, pour order 16): 730,1230 3630,1230 3630,2735 730,2735

## Other copper
Top Layer:
  region net VBatt: 1445,2375
  region: 1280,1830

## Silkscreen, mask and mechanical layers (free items; w line width, h text height)
Top Overlay:
  text "Spring 2020" at 2605,2260 h30 r270
  text "Dog Tag Rev 3" at 2685,2260 h30 r270
  text "Ryan ZumBrunnen" at 2760,2260 h30 r270
  text "CK" at 1375,1470 h30
  text "MOSI" at 1045,1340 h30
Bottom Overlay:
  text "VCC" at 1735,2385 h30
  text "VBATT" at 975,2345 h30
  text "VBATT" at 1625,2335 h30
  text "VBATT" at 2110,2300 h30 r90
  text "GND" at 2270,2300 h30 r90
  text "GND" at 975,2295 h30
  text "GND" at 1570,2265 h30
  text "GND" at 960,2105 h30 r90
  text "VCC" at 935,1805 h30 r90
  text "TXD" at 1050,1805 h30 r90
  text "RXD" at 1115,1805 h30 r90
  text "DTR" at 1280,1780 h30 r90
  text "3V" at 2730,1550 h30
  text "SCK" at 1325,1505 h30 r270
  text "MISO" at 1265,1460 h30 r270
  text "MOSI" at 1175,1410 h30 r270
Mechanical 1:
  lines w10: 1459.94,1465.04 cw(c1148.31,1660.3) 950,1970 cw(c1148.31,2279.7) 1459.94,2474.96 ; 1460,1465 2895,1465 ; 1460,2475 2895,2475 ; 2895.06,1465.04 ccw(c3206.69,1660.3) 3405,1970 ccw(c3206.69,2279.7) 2895.06,2474.96
Mechanical 13:
  lines w10: 2905,1520 2905,2420 ; 2905,1710 3155,1710 ; 2905,1970 3405,1970 ; 2905,2230 3155,2230
Mechanical 15:
  lines w10: 1535,2340.71 1535,2345 ; 2234.29,1970.71 2734.29,1970.71 ; 1535,2345 3035,2345 3035,1595 1535,1595 1535,2345 ; 2731.93,1640 2886.93,1640 2886.93,2298.07 2883.58,2301.42 2731.93,2301.42 ; 2731.93,1640 2731.93,2301.42 ; 2731.93,1640 1665,1640 1665,2301.42 2731.93,2301.42